# Altium PCB gps_board.pcbdoc
Units mil, origin at the board's own origin, x right, y up, seen from the top; angles counter-clockwise.
Board outline 4050 x 4450 mil, 2 copper layers (Top Layer, Bottom Layer); 20 components, 88 nets, 188 pads, 5 vias.
Unrouted connection lines stored in the file: 37.
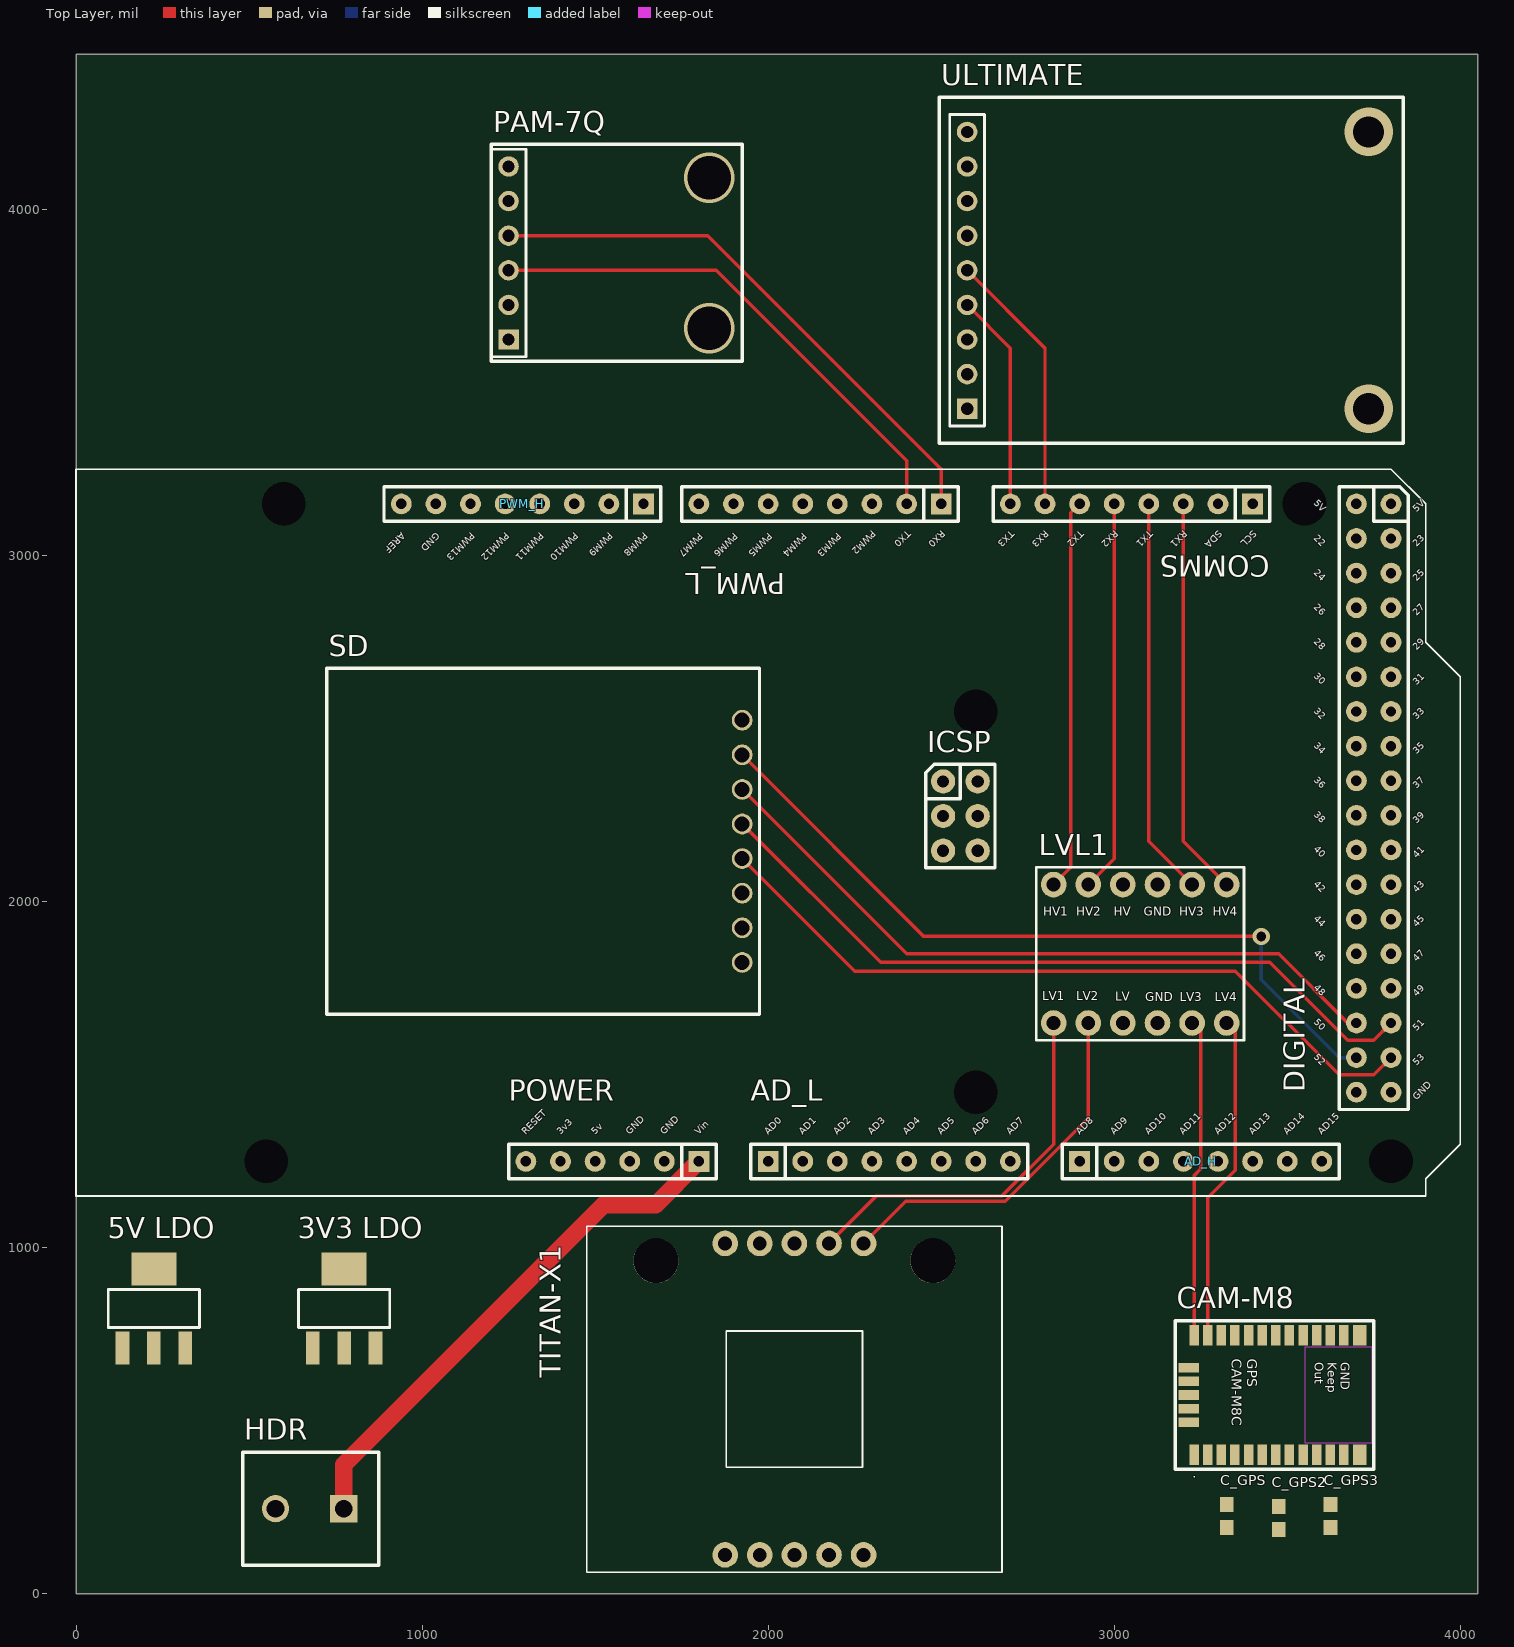
[diagram p0: Top Layer view]
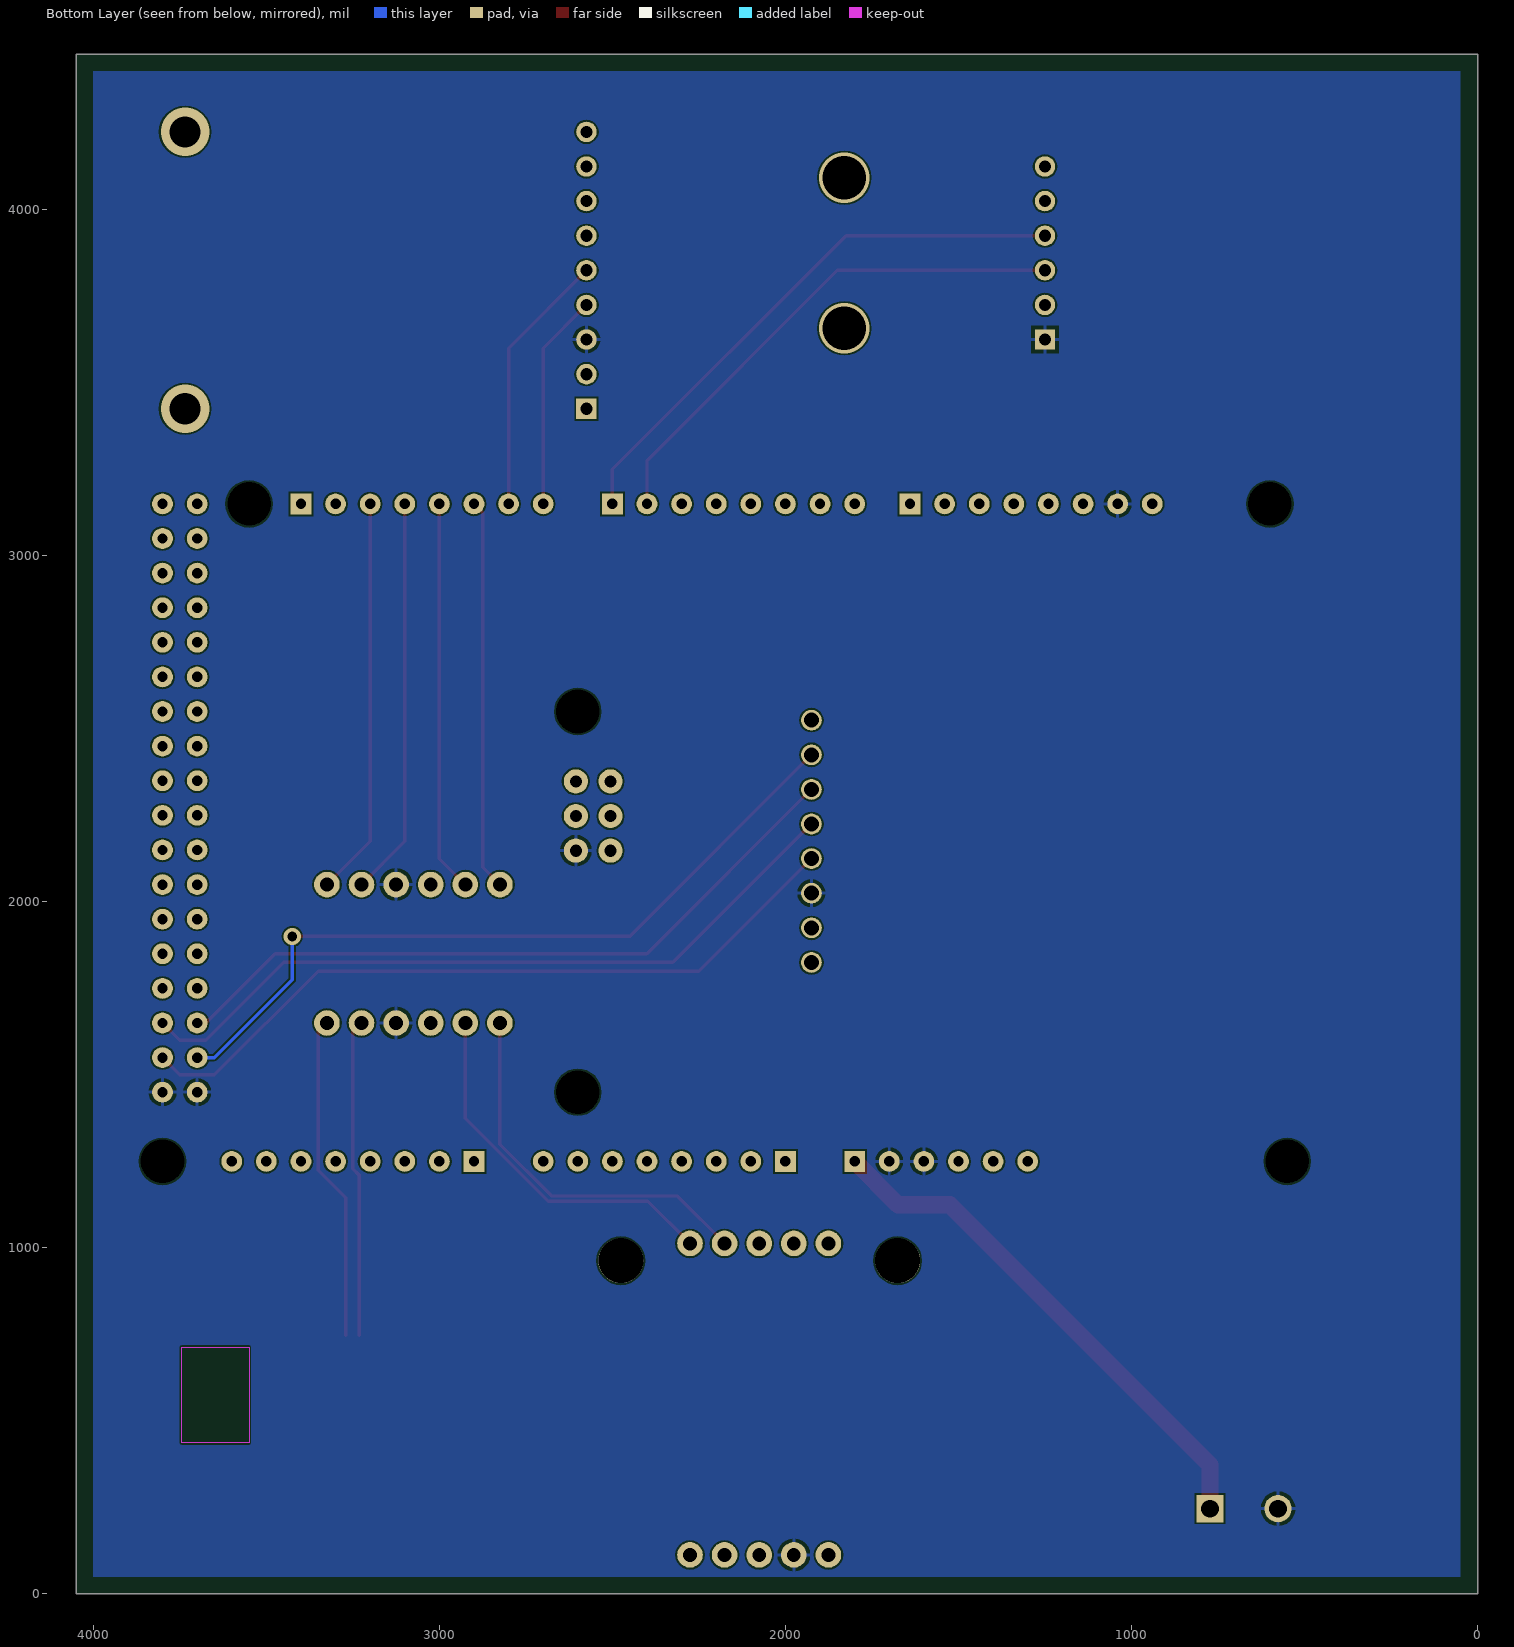
[diagram p1: Bottom Layer view, seen from below]

## Layer stack, top to bottom
Top Solder: solder mask 0.4, Solder Resist, Dk 3.5
Top Layer: signal copper 1.4
Dielectric1: dielectric 12.6, FR-4, Dk 4.8
Bottom Layer: signal copper 1.4
Bottom Solder: solder mask 0.4, Solder Resist, Dk 3.5

## Board outline
0,0 0,4450 4050,4450 4050,0

## Design rules (kind name [scope] priority, off if disabled: settings)
Clearance [All] p1: gap=5
PolygonConnect [All] p1: connectstyle=Relief reliefconductorwidth=10 reliefentries=4 polygonreliefangle="90 Angle" airgapwidth=10
RoutingVias [All] p1: holewidth=28 width=50 viastyle="Through Hole" minholewidth=28 minwidth=50 maxholewidth=28 maxwidth=50
SilkToSolderMaskClearance SilkscreenOverComponentPads [IsPad] p1: minsilkscreentomaskgap=10 clearancetoexposedcopper=TRUE
SolderMaskExpansion [All] p1: expansion=4
Width [All] p1: maxlimit=50 minlimit=10 preferedwidth=10
29 further rules are at their usual default settings.

## Components (designator, comment, footprint, x,y, rotation, side; value= is the part's Value field where it differs from the comment)
"3V3 LDO" "TLV1117LV30" SOT223-4N 775,825 r90 top
"5V LDO" "TLV1117LV30" SOT223-4N 225,825 r90 top
AD_H "AD_H" "Header 8x1 8.5mm" 2900,1250 r0 top locked
AD_L "AD_L" "Header 8x1 8.5mm" 2000,1250 r0 top locked
C_GPS "Cap" 0603 3325,225 r90 top
C_GPS2 "Cap" 0603 3475,220 r90 top
C_GPS3 "Cap" 0603 3625,225 r90 top
CAM-M8 "CAM-M8" CAM_M8C_GPS 3475,575 r270 top
COMMS "Communication" "Header 8x1 8.5mm" 3400,3150 r180 top
DIGITAL "IO_36" "HEADER 36X 8MM" 3800,3150 r270 top locked
HDR "" TERMINALBLOCK_1935161 675,250 r180 top
ICSP "ICSP" ICSP 2505.51,2348.03 r0 top locked
LVL1 "Level Shifter" "Level Shifter" 3325,1650 r0 top
PAM-7Q "PAM-7Q" PAM7Q 1250,3625 r90 top
POWER "POWER" "Header 6x1 8.5mm" 1800,1250 r180 top locked
PWM_H "PWM_H" "Header 8x1 8.5mm" 1640,3150 r180 top locked
PWM_L "PWM_L" "Header 8x1 8.5mm" 2500,3150 r180 top locked
SD "MicroSD" MICROSD_BREAKOUT 1925,2175 r0 top
TITAN-X1 "Titan_X1" TITANX1 1250,1800 r0 top
ULTIMATE "Adafruit_Ultimate_GPS" Adafruit_Ultimate_GPS 2575,3425 r90 top

## Footprints (in the part's own frame and the unit in brackets; to place one, negate y for a bottom-side part, rotate by r counter-clockwise, add the part's x,y. Pads: shape width x height; smd on the part's side, far side on the other; paste and mask are expansions set on the pad)
0603 [mm] "0603"
  rect 1.1x1 smd: 1(-0.85,0) 2(0.85,0)
Adafruit_Ultimate_GPS [mm] "Adafruit GPS Breakout Board"
  rect 1.5x1.5 hole 0.9: 1(0,0)
  round 1.5 hole 0.9: 2(2.54,0) 3(5.08,0) 4(7.62,0) 5(10.16,0) 6(12.7,0) 7(15.24,0) 8(17.78,0) 9(20.32,0)
  silkscreen extent -2.54,-32 22.86,2.03, body extent -2.54,-32 22.86,2.03, height 2.11
CAM_M8C_GPS [mm]
  rect 1.5x0.7 smd: 1(4.4,-6.2) 2(4.4,-5.2) 3(4.4,-4.2) 4(4.4,-3.2) 5(4.4,-2.2) 6(4.4,-1.2) 7(4.4,-0.2) 8(4.4,0.8) 9(4.4,1.8) 10(4.4,2.8) 11(4.4,3.8) 12(4.4,4.8) 15(-4.4,4.8) 16(-4.4,3.8) 17(-4.4,2.8) 18(-4.4,1.8) 19(-4.4,0.8) 20(-4.4,-0.2) 21(-4.4,-1.2) 22(-4.4,-2.2) 23(-4.4,-3.2) 24(-4.4,-4.2) 25(-4.4,-5.2) 26(-4.4,-6.2)
  rect 1.5x1 smd: 13(4.4,5.95) 14(-4.4,5.95)
  rect 0.7x1.5 smd: 27(-2,-6.6) 28(-1,-6.6) 29(0,-6.6) 30(1,-6.6) 31(2,-6.6)
  Keep-Out Layer region: -3.5,1.905 3.5,1.905 3.5,6.858 -3.5,6.858
  silkscreen extent -5.46,-7.6 5.46,7
"Header 6x1 8.5mm" [mil] "Stackable 6 pin header"
  rect 60x60 hole 30: 1(0,0)
  round 60 hole 30: 2(100,0) 3(200,0) 4(300,0) 5(400,0) 6(500,0)
  silkscreen extent -50,-50 550,50, body extent -50,-50 550,50, height 335
"Header 8x1 8.5mm" [mil] "Stackable 8 pin header"
  rect 60x60 hole 30: 1(0,0)
  round 60 hole 30: 2(100,0) 3(200,0) 4(300,0) 5(400,0) 6(500,0) 7(600,0) 8(700,0)
  silkscreen extent -50,-50 750,50, body extent -50,-50 750,50, height 335
"HEADER 36X 8MM" [mil] "Stackable 10 pin header"
  round 60 hole 30: 1(0,0) 2(0,-100) 3(100,0) 4(100,-100) 5(200,0) 6(200,-100) 7(300,0) 8(300,-100) 9(400,0) 10(400,-100) 11(500,0) 12(500,-100) 13(600,0) 14(600,-100) 15(700,0) 16(700,-100) 17(800,0) 18(800,-100) 19(900,-100) 20(900,0) 21(1000,0) 22(1000,-100) 23(1100,0) 24(1100,-100) 25(1200,0) 26(1200,-100) 27(1300,0) 28(1300,-100) 29(1400,0) 30(1400,-100) 31(1500,0) 32(1500,-100) 33(1600,0) 34(1600,-100) 35(1700,0) 36(1700,-100)
  silkscreen extent -50,-150 1750,50, body extent -50,-150 1750,50, height 335
ICSP [mil]
  round 70 hole 35.43: 1(0,0) 2(100,0) 3(0,-100) 4(100,-100) 5(0,-200) 6(100,-200)
  silkscreen extent -50,-250 150,50, body extent -50,-250 150,50, height 485
"Level Shifter" [mil] "1X06"
  round 74 hole 40: 1(0,0) 2(-100,0) 3(-200,0) 4(-300,0) 5(-400,0) 6(-500,0) 7(0,400) 8(-100,400) 9(-200,400) 10(-300,400) 11(-400,400) 12(-500,400)
  silkscreen extent -550,-50 50,450
MICROSD_BREAKOUT [mil] "Adafruit MicroSD card breakout board+"
  round 60 hole 43.31: 1(0,350) 2(0,250) 3(0,150) 4(0,50) 5(0,-50) 6(0,-150) 7(0,-250) 8(0,-350)
  silkscreen extent -1200,-500 50,500
PAM7Q [mm]
  rect 1.5x1.5 hole 0.9: 1(0,0)
  round 1.5 hole 0.9: 2(2.54,0) 3(5.08,0) 4(7.62,0) 5(10.16,0) 6(12.7,0)
  silkscreen extent -1.61,-17.14 14.32,1.27, body extent -1.61,-17.09 14.32,1.32, height 2.11
SOT223-4N [mm] "SOT223, 4-Leads, Body 6.5x3.5mm, Pitch 2.3mm, Lead Span 7mm, IPC Medium Density"
  rect 2.4x1 smd: 1(-2.9,2.3) 2(-2.9,0) 3(-2.9,-2.3)
  rect 2.4x3.3 smd: 4(2.9,0)
  silkscreen extent -1.4,-3.35 1.4,3.35, body extent -1.85,-3.35 1.85,3.35, height 1.8
TERMINALBLOCK_1935161 [mm]
  rect 2x2 hole 1.3: 1(-2.5,0.086)
  round 2 hole 1.3: 2(2.5,0.086)
  silkscreen extent -5.08,-4.06 4.92,4.24, body extent -5.07,-4.17 4.83,4.17, height 8.41
TITANX1 [mil]
  round 74 hole 40: 0(625.83,-1687.05) 1(725.83,-1687.05) 2(825.83,-1687.05) 3(925.83,-1687.05) 4(1025.83,-1687.05) 5(625.83,-787.05) 6(725.83,-787.05) 7(825.83,-787.05) 8(925.83,-787.05) 9(1025.83,-787.05)
  round 130 hole 130: ""(425.83,-837.05) ""(1225.83,-837.05)
  silkscreen extent 226,-1737 1426,-737

## Part data
"3V3 LDO" "5V LDO": library part "LDO Generic"
C_GPS C_GPS2 C_GPS3: "Capacitor"
CAM-M8 PAM-7Q: "GPS"
HDR: library part TerminalBlock_1x2

## Free pads (board coordinates)
  round 62.99 hole 125.98: 0(550,1250) 0(600,3150) 0(2600,1450) 0(2600,2550) 0(3550,3150) 0(3800,1250)

## Via types
v1: diameter 140, hole 90, Top Layer to Bottom Layer, 2 vias
v2: diameter 145, hole 125, Top Layer to Bottom Layer, 2 vias
v3: diameter 50, hole 28, Top Layer to Bottom Layer, 1 vias

## Nets (pads, with @x,y where several pads share a name; then routed paths per layer and width w, separated by ;. In a path a pad name is that pad's centre, name@x,y a point inside that pad or via, vN(x,y) a via of type N, cw(c..) or ccw(c..) an arc to the next point about the centre after c; other vN are vias at no path point)
5V: DIGITAL.1 DIGITAL.2
AD0: AD_L.1
AD1: AD_L.2
AD2: AD_L.3
AD3: AD_L.4
AD4: AD_L.5
AD5: AD_L.6
AD6: AD_L.7
AD7: AD_L.8
AD8: AD_H.1
AD9: AD_H.2
AD10: AD_H.3
AD11: AD_H.4
AD12: AD_H.5
AD13: AD_H.6
AD14: AD_H.7
AD15: AD_H.8
AREF: PWM_H.8
GND: "3V3 LDO.2" "3V3 LDO.4" "5V LDO.2" "5V LDO.4" C_GPS2.1 C_GPS3.1 C_GPS.1 CAM-M8.4 CAM-M8.5 CAM-M8.10 CAM-M8.11 CAM-M8.12 CAM-M8.13 CAM-M8.14 CAM-M8.15 CAM-M8.18 CAM-M8.19 CAM-M8.21 CAM-M8.22 CAM-M8.27 CAM-M8.31 DIGITAL.35 DIGITAL.36 HDR.2 ICSP.6 LVL1.3 LVL1.9 PAM-7Q.1 POWER.2 POWER.3 PWM_H.7 SD.6 TITAN-X1.1 ULTIMATE.3
IO22: DIGITAL.3
IO23: DIGITAL.4
IO24: DIGITAL.5
IO25: DIGITAL.6
IO26: DIGITAL.7
IO27: DIGITAL.8
IO28: DIGITAL.9
IO29: DIGITAL.10
IO30: DIGITAL.11
IO31: DIGITAL.12
IO32: DIGITAL.13
IO33: DIGITAL.14
IO34: DIGITAL.15
IO35: DIGITAL.16
IO36: DIGITAL.17
IO37: DIGITAL.18
IO38: DIGITAL.19
IO39: DIGITAL.20
IO40: DIGITAL.21
IO41: DIGITAL.22
IO42: DIGITAL.23
IO43: DIGITAL.24
IO44: DIGITAL.25
IO45: DIGITAL.26
IO46: DIGITAL.27
IO47: DIGITAL.28
IO48: DIGITAL.29
IO49: DIGITAL.30
IO50: DIGITAL.31 SD.4 | length 2154.6
  Top Layer w10: SD.4 2325,1825 3450,1825 3675,1600 3750,1600 DIGITAL.31
IO51: DIGITAL.32 SD.3 | length 2054.6
  Top Layer w10: SD.3 2400,1850 3475,1850 3675,1650 DIGITAL.32
IO52: DIGITAL.33 SD.5 | length 2154.6
  Top Layer w10: SD.5 2250,1800 3350,1800 3650,1500 3750,1500 DIGITAL.33
IO53: DIGITAL.34 SD.2 | length 2210.7
  Top Layer w10: SD.2 2450,1900 v3(3425,1900)
  Bottom Layer w10: v3(3425,1900) 3425,1775 3650,1550 DIGITAL.34
MISO: ICSP.1
MOSI: ICSP.4
"Net3V3 LDO_3": "3V3 LDO.3" C_GPS2.2 C_GPS3.2 C_GPS.2 CAM-M8.1 CAM-M8.8 CAM-M8.9 LVL1.4 PAM-7Q.5 TITAN-X1.2
"Net5V LDO_3": "5V LDO.3" LVL1.10 SD.8 ULTIMATE.2
NetCAM-M8_16: CAM-M8.16 CAM-M8.17
NetCAM-M8_25: CAM-M8.25 LVL1.1 | length 945.1
  Top Layer w10: CAM-M8.25 3270.28,1145.28 3350,1225 3350,1625 LVL1.1
NetCAM-M8_26: CAM-M8.26 LVL1.2 | length 920
  Top Layer w10: LVL1.2 3250,1625 3250,1228.43 3230.91,1209.34 CAM-M8.26
NetLVL1_5: LVL1.5 TITAN-X1.9 | length 1074.1
  Top Layer w10: TITAN-X1.9 2397.87,1135 2685,1135 2925,1375 LVL1.5
NetLVL1_6: LVL1.6 TITAN-X1.8 | length 1118.1
  Top Layer w10: TITAN-X1.8 2312.87,1150 2675,1150 2825,1300 LVL1.6
NetTITAN-X1_0: TITAN-X1.0
NetTITAN-X1_5: TITAN-X1.5
NetTITAN-X1_6: TITAN-X1.6
NetTITAN-X1_7: TITAN-X1.7
PWM2: PWM_L.3
PWM3: PWM_L.4
PWM4: PWM_L.5
PWM5: PWM_L.6
PWM6: PWM_L.7
PWM7: PWM_L.8
PWM8: PWM_H.1
PWM9: PWM_H.2
PWM10: PWM_H.3
PWM11: PWM_H.4
PWM12: PWM_H.5
PWM13: PWM_H.6
RX0: PAM-7Q.4 PWM_L.1 | length 1629.6
  Top Layer w10: PAM-7Q.4 1825,3925 2500,3250 PWM_L.1
RX1: COMMS.3 LVL1.7 | length 1151.8
  Top Layer w10: COMMS.3 3200,2175 LVL1.7
RX2: COMMS.5 LVL1.11 | length 1131.1
  Top Layer w10: LVL1.11 3000,2125 COMMS.5
RX3: COMMS.7 ULTIMATE.5 | length 768.2
  Top Layer w10: ULTIMATE.5 2800,3600 COMMS.7
SCK: ICSP.3
SCL: COMMS.1
SDA: COMMS.2
TX0: PAM-7Q.3 PWM_L.2 | length 1502.8
  Top Layer w10: PAM-7Q.3 1850,3825 2400,3275 PWM_L.2
TX1: COMMS.4 LVL1.8 | length 1151.8
  Top Layer w10: COMMS.4 3100,2175 LVL1.8
TX2: COMMS.6 LVL1.12 | length 1131.1
  Top Layer w10: LVL1.12 2875,2100 2875,3125 COMMS.6
TX3: COMMS.8 ULTIMATE.4 | length 626.8
  Top Layer w10: ULTIMATE.4 2700,3600 COMMS.8
VIN: "3V3 LDO.1" "5V LDO.1" HDR.1 POWER.1 | length 1516.5
  Top Layer w50: HDR.1 773.43,373.43 1525,1125 1675,1125 POWER.1
pads on no net: CAM-M8.2 CAM-M8.3 CAM-M8.6 CAM-M8.7 CAM-M8.20 CAM-M8.23 CAM-M8.24 CAM-M8.28 CAM-M8.29 CAM-M8.30 ICSP.2 ICSP.5 PAM-7Q.2 PAM-7Q.6 POWER.4 POWER.5 POWER.6 SD.1 SD.7 TITAN-X1. TITAN-X1.3 TITAN-X1.4 ULTIMATE.1 ULTIMATE.6 ULTIMATE.7 ULTIMATE.8 ULTIMATE.9
copper on no net:
  other v1: 3735,3425 3735,4225
  other v2: 1830,3657.5 1830,4092.5

## Polygon pours and split planes (outlines as drawn)
GND on Bottom Layer "GND_POUR" (solid, remove dead copper, pour order 0): 50,4400 50,50 4000,50 4000,4400

## Silkscreen, mask and mechanical layers (free items; w line width, h text height)
Top Overlay:
  lines w5: 0,1150 3900,1150 3900,1200 4000,1300 4000,2650 3900,2750 3900,3150 3800,3250 0,3250 0,1150
  text "5V" at 3575,3150 h20 r315
  text "5V" at 3875,3125 h20 r45
  text "PWM2" at 2300,3075 h20 r225
  text "TX0" at 2400,3075 h20 r225
  text "RX0" at 2500,3075 h20 r225
  text "TX3" at 2700,3075 h20 r225
  text "RX3" at 2800,3075 h20 r225
  text "TX2" at 2900,3075 h20 r225
  text "RX2" at 3000,3075 h20 r225
  text "TX1" at 3100,3075 h20 r225
  text "RX1" at 3200,3075 h20 r225
  text "SDA" at 3300,3075 h20 r225
  text "SCL" at 3400,3075 h20 r225
  text "AREF" at 940,3070 h20 r225
  text "GND" at 1040,3070 h20 r225
  text "PWM13" at 1140,3070 h20 r225
  text "PWM12" at 1240,3070 h20 r225
  text "PWM11" at 1340,3070 h20 r225
  text "PWM10" at 1440,3070 h20 r225
  text "PWM9" at 1540,3070 h20 r225
  text "PWM8" at 1640,3070 h20 r225
  text "PWM7" at 1800,3067.93 h20 r225
  text "PWM6" at 1900,3067.93 h20 r225
  text "PWM5" at 2000,3067.93 h20 r225
  text "PWM4" at 2100,3067.93 h20 r225
  text "PWM3" at 2200,3067.93 h20 r225
  text "22" at 3575,3050 h20 r315
  text "23" at 3875,3025 h20 r45
  text "24" at 3575,2950 h20 r315
  text "25" at 3875,2925 h20 r45
  text "26" at 3575,2850 h20 r315
  text "27" at 3875,2825 h20 r45
  text "28" at 3575,2750 h20 r315
  text "29" at 3875,2725 h20 r45
  text "30" at 3575,2650 h20 r315
  text "31" at 3875,2625 h20 r45
  text "32" at 3575,2550 h20 r315
  text "33" at 3875,2525 h20 r45
  text "34" at 3575,2450 h20 r315
  text "35" at 3875,2425 h20 r45
  text "36" at 3575,2350 h20 r315
  text "37" at 3875,2325 h20 r45
  text "38" at 3575,2250 h20 r315
  text "39" at 3875,2225 h20 r45
  text "40" at 3575,2150 h20 r315
  text "41" at 3875,2125 h20 r45
  text "42" at 3575,2050 h20 r315
  text "43" at 3875,2025 h20 r45
  text "44" at 3575,1950 h20 r315
  text "45" at 3875,1925 h20 r45
  text "46" at 3575,1850 h20 r315
  text "47" at 3875,1825 h20 r45
  text "48" at 3575,1750 h20 r315
  text "49" at 3875,1725 h20 r45
  text "50" at 3575,1650 h20 r315
  text "51" at 3875,1625 h20 r45
  text "52" at 3575,1550 h20 r315
  text "53" at 3875,1525 h20 r45
  text "GND" at 3875,1425 h20 r45
  text "RESET" at 1300,1325 h20 r45
  text "3v3" at 1400,1325 h20 r45
  text "5v" at 1500,1325 h20 r45
  text "GND" at 1600,1325 h20 r45
  text "GND" at 1700,1325 h20 r45
  text "Vin" at 1800,1325 h20 r45
  text "AD0" at 2000,1325 h20 r45
  text "AD1" at 2100,1325 h20 r45
  text "AD2" at 2200,1325 h20 r45
  text "AD3" at 2300,1325 h20 r45
  text "AD4" at 2400,1325 h20 r45
  text "AD5" at 2500,1325 h20 r45
  text "AD6" at 2600,1325 h20 r45
  text "AD7" at 2700,1325 h20 r45
  text "AD8" at 2900,1325 h20 r45
  text "AD9" at 3000,1325 h20 r45
  text "AD10" at 3100,1325 h20 r45
  text "AD11" at 3200,1325 h20 r45
  text "AD12" at 3300,1325 h20 r45
  text "AD13" at 3400,1325 h20 r45
  text "AD14" at 3500,1325 h20 r45
  text "AD15" at 3600,1325 h20 r45
Mechanical 1:
  circle w5: c600,3150 r62.99
  circle w5: c2600,1450 r62.99
  circle w5: c550,1250 r62.99
  circle w5: c2600,2550 r62.99
  circle w5: c3550,3150 r62.99
  circle w5: c3800,1250 r62.99
  lines w5: 0,0 0,4450 4050,4450 4050,0 0,0

## Text inside footprints (layer, text, board x,y; h text height)
CAM-M8: Top Overlay "GPS / CAM-M8C" at 3340,680 h30 r270; Top Overlay "GND  / Keep / Out" at 3580,670 h25 r270
LVL1: Top Overlay "HV1" at 2795,1960 h25.5; Top Overlay "HV4" at 3285,1960 h25.5; Top Overlay "HV2" at 2890,1960 h25.5; Top Overlay "HV3" at 3188,1960 h25.5; Top Overlay "GND" at 3085,1960 h25.5; Top Overlay "GND" at 3090,1713 h25.5; Top Overlay "HV" at 2998,1960 h25.5; Top Overlay "LV" at 3003,1714 h25.5; Top Overlay "LV3" at 3190,1713 h25.5; Top Overlay "LV2" at 2890,1715 h25.5; Top Overlay "LV4" at 3291,1713 h25.5; Top Overlay "LV1" at 2792,1715 h25.5